# Altium PCB PCB.PcbDoc
Units mil, origin at the board's own origin, x right, y up, seen from the top; angles counter-clockwise.
Board outline 1740.03 x 1555.03 mil, 2 copper layers (Top Layer, Bottom Layer); 49 components, 128 nets, 276 pads, 47 vias.
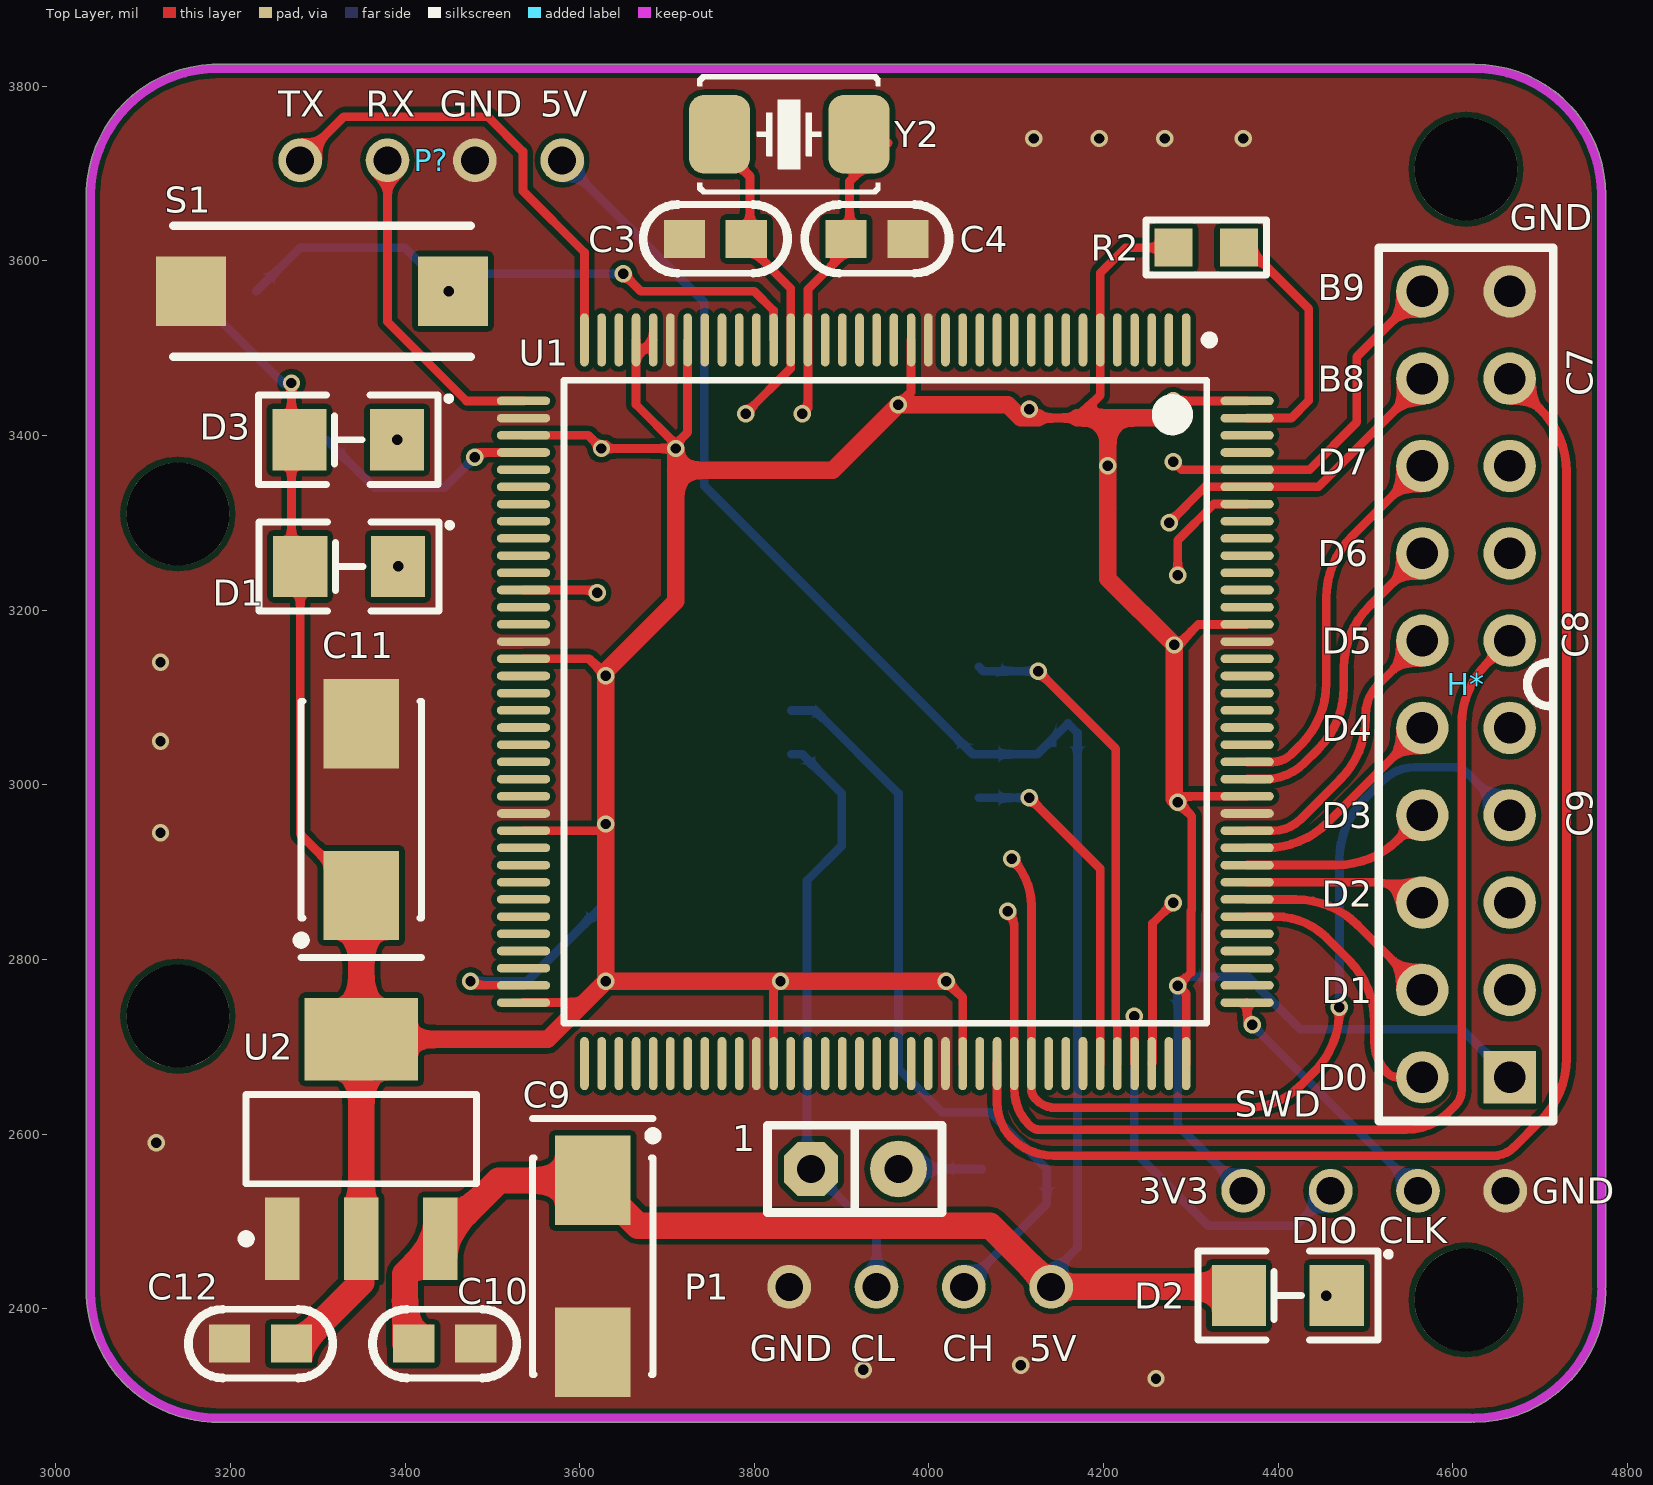
[diagram p0: Top Layer view]
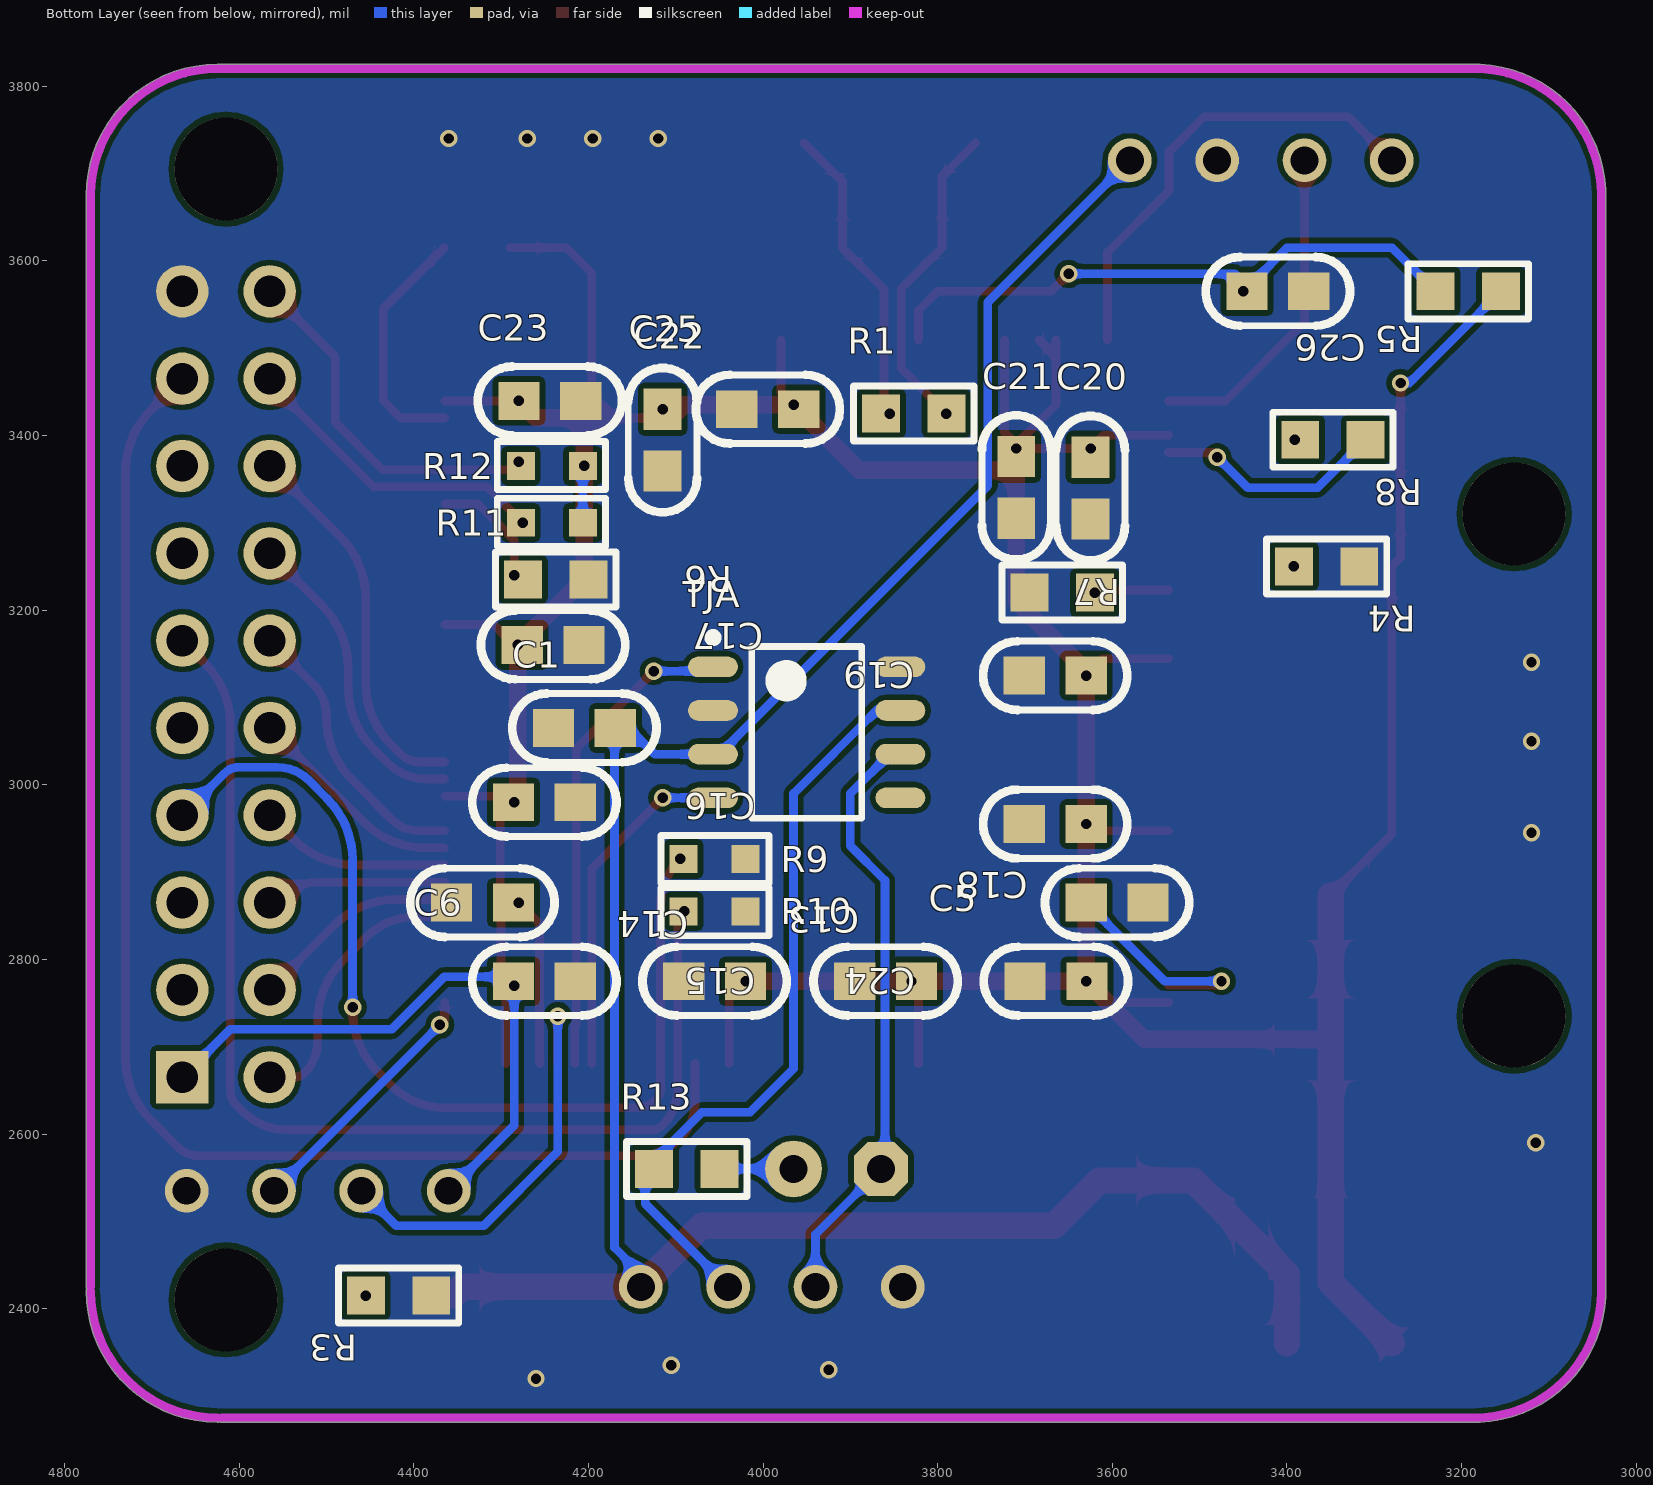
[diagram p1: Bottom Layer view, seen from below]
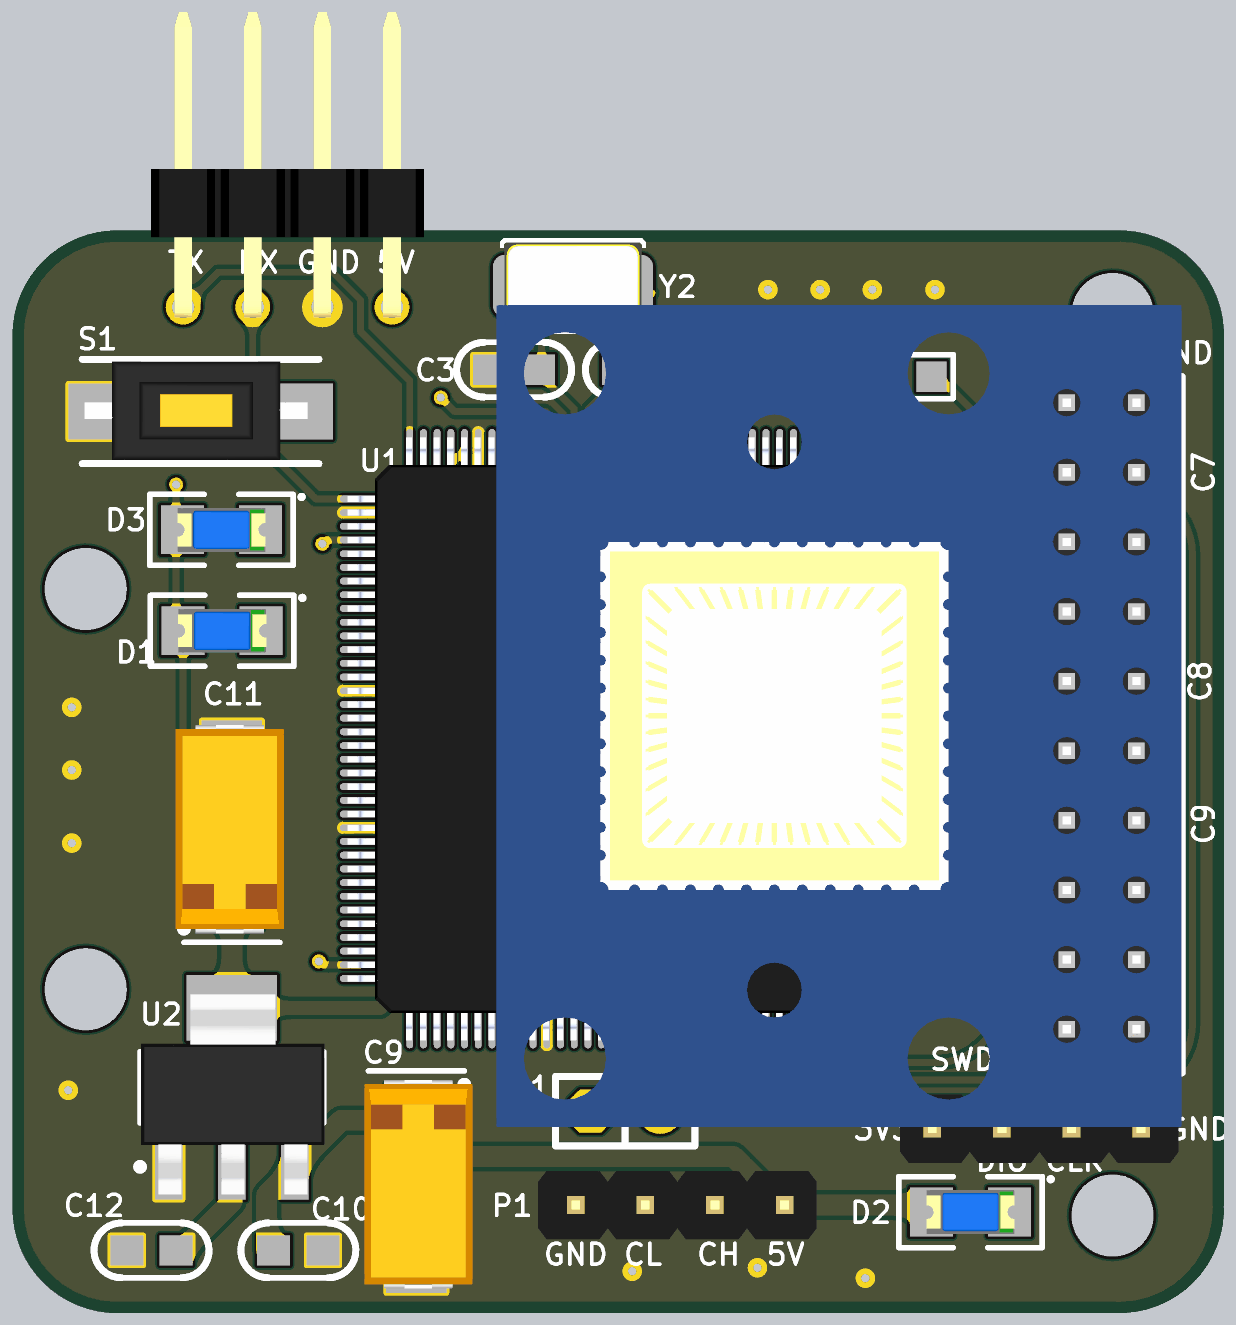
[diagram p2: 3D render of the assembled board from above, using the file's embedded part models]

## Layer stack, top to bottom
Top Solder: solder mask 0.4, Solder Resist, Dk 3.5
Top Layer: signal copper 1.4
Dielectric 1: dielectric 12.6, FR-4, Dk 4.8
Bottom Layer: signal copper 1.4
Bottom Solder: solder mask 0.4, Solder Resist, Dk 3.5

## Board outline
3035.11,2413.89 cw(c3040,2415) 3034.99,2415 3034.99,3680 cw(c3040,3680) 3035.11,3681.11 cw(c3185,3675) 3178.89,3824.89 cw(c3180,3820) 3180,3825.01 4625,3825.01 cw(c4625,3675) 4775.02,3675 4775.02,2425 cw(c4770,2425) 4774.35,2422.5 cw(c4770,2420) 4775.02,2420 cw(c4625,2420) 4625,2269.99 cw(c4625,2275) 4622.5,2270.65 cw(c4620,2275) 4620,2269.99 3180,2269.99 cw(c3180,2275) 3178.89,2270.11 cw(c3185,2420)

## Design rules (kind name [scope] priority, off if disabled: settings)
Clearance [All] p1: gap=6 ignorepadtopadclearanceinfootprint=FALSE
PlaneConnect [All] p1: planeconnectstyle=Direct reliefexpansion=20 reliefentries=4 reliefconductorwidth=10 reliefairgap=10
PolygonConnect [All] p1: connectstyle=Direct reliefconductorwidth=10 reliefentries=4 polygonreliefangle="90 Angle" airgapwidth=10
RoutingVias [All] p1: holewidth=28 width=50 viastyle="Through Hole" minholewidth=28 minwidth=50 maxholewidth=28 maxwidth=50
SolderMaskExpansion [All] p1: expansion=4
Width [All] p1: maxlimit=80 minlimit=10 preferedwidth=10 minimp=50.000000 maximp=50.000000 favimp=50.000000
29 further rules are at their usual default settings.

## Classes and differential pairs
component class 接口: 1 C1 H* P1 P? R9 R10 R11 R12 R13 TJA
component class core: C3 C4 C5 C6 C9 C10 C11 C12 C13 C14 C15 C16 C17 C18 C19 C20 C21 C22 C23 C24 C25 C26 D1 D2 D3 R1 R2 R3 R4 R5 R6 R7 R8 S1 SWD U1 U2 Y2

## Components (designator, comment, footprint, x,y, rotation, side; value= is the part's Value field where it differs from the comment)
1 "Header 2" SIP2 3965,2560 r180 top
C1 "CAP" CAP-MLCC-0603 4240,3065 r180 bottom value=104
C3 "CAP" CAP-MLCC-0603 3720,3625 r0 top value=22pF
C4 "CAP" CAP-MLCC-0603 3975.87,3625 r180 top value=22pF
C5 "225" CAP-MLCC-0603 3630,2865 r180 bottom value=*μF
C6 "225" CAP-MLCC-0603 4285.87,2865 r0 bottom value=*μF
C9 "CAP-TAN" CAP-TAN-6032/CAPC 3615,2546.85 r90 top value=47μF
C10 "CAP" CAP-MLCC-0603 3480.87,2360 r180 top value=104
C11 "CAP-TAN" CAP-TAN-6032/CAPC 3350,2873.15 r270 top value=47μF
C12 "CAP" CAP-MLCC-0603 3199.13,2360 r0 top value=104
C13 "CAP" CAP-MLCC-0603 3895,2775 r180 bottom value=104
C14 "CAP" CAP-MLCC-0603 4090.87,2775 r180 bottom value=104
C15 "CAP" CAP-MLCC-0603 4215,2775 r0 bottom value=104
C16 "CAP" CAP-MLCC-0603 4215,2980 r0 bottom value=104
C17 "CAP" CAP-MLCC-0603 4205,3160 r0 bottom value=104
C18 "CAP" CAP-MLCC-0603 3700.87,2955 r180 bottom value=104
C19 "CAP" CAP-MLCC-0603 3700.87,3125 r180 bottom value=104
C20 "CAP" CAP-MLCC-0603 3625,3304.13 r90 bottom value=104
C21 "CAP" CAP-MLCC-0603 3710,3305 r90 bottom value=104
C22 "CAP" CAP-MLCC-0603 4030,3430 r180 bottom value=104
C23 "CAP" CAP-MLCC-0603 4208.62,3439.49 r0 bottom value=104
C24 "1uF" CAP-MLCC-0603 3700,2775 r180 bottom value=*μF
C25 "10nF" CAP-MLCC-0603 4115,3359.13 r90 bottom value=*μF
C26 "0.1u" CAP-MLCC-0603 3375,3565 r0 bottom value=*μF
D1 "LED" LED-1206 3336,3250 r180 top value=(Red)
D2 "LED" LED-1206 4411,2415 r180 top value=(Red)
D3 "LED" LED-1206 3335,3395 r180 top value=(Red)
H* "鹰眼" H10X2 4665,2665 r180 top
P1 "HDR1x4_2.54" HDR1x4_2.54_180 4140,2425 r270 top
P? "HDR1x4_2.54" HDR1X4_2.54_90 3280,3715 r90 top
R1 "1MΩ" RES-0603 3790,3425 r0 bottom value=*kΩ
R2 "0Ω" RES-0603 4280.2,3615 r0 top value=*kΩ
R3 "RES" RES-0603 4454.8,2415 r180 bottom value=2kΩ
R4 "RES" RES-0603 3317.2,3250 r0 bottom value=1K
R5 "RES" RES-0603 3229.8,3565 r180 bottom value=100K
R6 "RES" RES-0603 4200,3235 r0 bottom value=10kΩ
R7 "RES" RES-0603 3694.8,3220 r180 bottom value=10kΩ
R8 "RES" RES-0603 3310,3395 r0 bottom value=1K
R9 "Res_0603" RES_0603 4057,2833 r0 bottom value=150R
R10 "Res_0603" RES_0603 4057,2773 r0 bottom value=150R
R11 "Res_0603" RES_0603 4240.37,3382 r180 bottom value=?K
R12 "Res_0603" RES_0603 4240.37,3447 r180 bottom value=4.7K
R13 "Res1" RES-0603 4050,2560 r0 bottom value=120
S1 "SW-PB" KEY_SMD 3300,3560 r180 top
SWD "HDR1x4_2.54" HDR1x4_2.54_180 4360,2535 r90 top
TJA "TJA1050" TJA1050 3950,3060 r180 bottom
U1 "STM32F407ZGET6" LQFP144-L 3950,3095 r270 top
U2 "IC-AS1117-3.3V" SOT-223 3259.45,2480 r0 top
Y2 "8MHz" XT_5032_2 3840,3745 r180 top

## Footprints (in the part's own frame and the unit in brackets; to place one, negate y for a bottom-side part, rotate by r counter-clockwise, add the part's x,y. Pads: shape width x height; smd on the part's side, far side on the other; paste and mask are expansions set on the pad)
CAP-MLCC-0603 [mm]
  rect 1.2x1.1 smd: 1(0,0) 2(1.8,0)
  silkscreen extent -1.2,-1 3,1, body extent 0.02,-0.48 1.77,0.47, height 0.85
CAP-TAN-6032/CAPC [mm]
  rect 2.6x2.2 smd: 1(0,0) 2(-5,0)
  silkscreen extent -5.65,-1.88 1.8,1.75, body extent -6.13,-2.05 1.47,1.9, height 3.1
H10X2 [mil] "鹰眼直插管脚"
  rect 60x60 hole 36: 1(0,0)
  round 60 hole 36: 2(100,0) 3(0,-100) 4(100,-100) 5(0,-200) 6(100,-200) 7(0,-300) 8(100,-300) 9(0,-400) 10(100,-400) 11(0,-500) 12(100,-500) 13(0,-600) 14(100,-600) 15(0,-700) 16(100,-700) 17(0,-800) 18(100,-800) 19(0,-900) 20(100,-900)
  silkscreen extent -50,-950 150,50, body extent -49,-1053 935,128, height 529
HDR1X4_2.54_90 [mil]
  round 50 hole 32: 1(0,0) 2(0,-100) 3(0,-200) 4(0,-300)
  body extent -15,-346 424,46, height 99
HDR1x4_2.54_180 [mil]
  round 50 hole 32: 1(0,0) 2(0,-100) 3(0,-200) 4(0,-300)
  body extent -49,-350 49,50, height 323
KEY_SMD [mil]
  rect 80x80 smd: 1(-155,-5) 2(145,-5)
  silkscreen extent -175,-80 165,70, body extent -159,-77 162,65, height 98
LED-1206 [mil]
  rect 62x70 smd: 1(56,0) 2(-56,0)
  silkscreen extent -116,-51 103,51, body extent -63,-31 63,32, height 43
LQFP144-L [mm]
  oval 1.55x0.25 smd: 1(-10.525,8.75) 2(-10.525,8.25) 3(-10.525,7.75) 4(-10.525,7.25) 5(-10.525,6.75) 6(-10.525,6.25) 7(-10.525,5.75) 8(-10.525,5.25) 9(-10.525,4.75) 10(-10.525,4.25) 11(-10.525,3.75) 12(-10.525,3.25) 13(-10.525,2.75) 14(-10.525,2.25) 15(-10.525,1.75) 16(-10.525,1.25) 17(-10.525,0.75) 18(-10.525,0.25) 19(-10.525,-0.25) 20(-10.525,-0.75) 21(-10.525,-1.25) 22(-10.525,-1.75) 23(-10.525,-2.25) 24(-10.525,-2.75) 25(-10.525,-3.25) 26(-10.525,-3.75) 27(-10.525,-4.25) 28(-10.525,-4.75) 29(-10.525,-5.25) 30(-10.525,-5.75) 31(-10.525,-6.25) 32(-10.525,-6.75) 33(-10.525,-7.25) 34(-10.525,-7.75) 35(-10.525,-8.25) 36(-10.525,-8.75) 73(10.525,-8.75) 74(10.525,-8.25) 75(10.525,-7.75) 76(10.525,-7.25) 77(10.525,-6.75) 78(10.525,-6.25) 79(10.525,-5.75) 80(10.525,-5.25) 81(10.525,-4.75) 82(10.525,-4.25) 83(10.525,-3.75) 84(10.525,-3.25) 85(10.525,-2.75) 86(10.525,-2.25) 87(10.525,-1.75) 88(10.525,-1.25) 89(10.525,-0.75) 90(10.525,-0.25) 91(10.525,0.25) 92(10.525,0.75) 93(10.525,1.25) 94(10.525,1.75) 95(10.525,2.25) 96(10.525,2.75) 97(10.525,3.25) 98(10.525,3.75) 99(10.525,4.25) 100(10.525,4.75) 101(10.525,5.25) 102(10.525,5.75) 103(10.525,6.25) 104(10.525,6.75) 105(10.525,7.25) 106(10.525,7.75) 107(10.525,8.25) 108(10.525,8.75)
  oval 0.25x1.55 smd: 37(-8.75,-10.525) 38(-8.25,-10.525) 39(-7.75,-10.525) 40(-7.25,-10.525) 41(-6.75,-10.525) 42(-6.25,-10.525) 43(-5.75,-10.525) 44(-5.25,-10.525) 45(-4.75,-10.525) 46(-4.25,-10.525) 47(-3.75,-10.525) 48(-3.25,-10.525) 49(-2.75,-10.525) 50(-2.25,-10.525) 51(-1.75,-10.525) 52(-1.25,-10.525) 53(-0.75,-10.525) 54(-0.25,-10.525) 55(0.25,-10.525) 56(0.75,-10.525) 57(1.25,-10.525) 58(1.75,-10.525) 59(2.25,-10.525) 60(2.75,-10.525) 61(3.25,-10.525) 62(3.75,-10.525) 63(4.25,-10.525) 64(4.75,-10.525) 65(5.25,-10.525) 66(5.75,-10.525) 67(6.25,-10.525) 68(6.75,-10.525) 69(7.25,-10.525) 70(7.75,-10.525) 71(8.25,-10.525) 72(8.75,-10.525) 109(8.75,10.525) 110(8.25,10.525) 111(7.75,10.525) 112(7.25,10.525) 113(6.75,10.525) 114(6.25,10.525) 115(5.75,10.525) 116(5.25,10.525) 117(4.75,10.525) 118(4.25,10.525) 119(3.75,10.525) 120(3.25,10.525) 121(2.75,10.525) 122(2.25,10.525) 123(1.75,10.525) 124(1.25,10.525) 125(0.75,10.525) 126(0.25,10.525) 127(-0.25,10.525) 128(-0.75,10.525) 129(-1.25,10.525) 130(-1.75,10.525) 131(-2.25,10.525) 132(-2.75,10.525) 133(-3.25,10.525) 134(-3.75,10.525) 135(-4.25,10.525) 136(-4.75,10.525) 137(-5.25,10.525) 138(-5.75,10.525) 139(-6.25,10.525) 140(-6.75,10.525) 141(-7.25,10.525) 142(-7.75,10.525) 143(-8.25,10.525) 144(-8.75,10.525)
  silkscreen extent -10.65,-9.35 9.35,9.55, body extent -10.99,-11.02 11.01,10.98, height 1.56
RES-0603 [mm]
  rect 1.1x1.1 smd: 1(0,0) 2(1.9,0)
  silkscreen extent -0.8,-0.8 2.7,0.8, body extent 0.1,-0.48 1.8,0.47, height 0.6
RES_0603 [mil]
  rect 32x32 smd: 1(-37,-82) 2(34,-82)
  silkscreen extent -64,-109 60,-54, body extent -31,-98 31,-66, height 18
SIP2 [mil]
  round 65 hole 32: 1(0,0)
  oct 62x62 hole 32: 2(100,0)
  silkscreen extent -50,-50 150,50
SOT-223 [mm] "SOT223, 4-Leads, Body 6.7x7.3mm (max), Pitch 2.30mm, IPC Medium Density"
  rect 1x2.4 smd: 1(0,0) 2(2.3,0) 3(4.6,0)
  rect 3.3x2.4 smd: 2(2.3,5.8)
  silkscreen extent -1.17,-0.12 5.65,4.2, body extent -1.01,-1.01 5.69,6.29, height 1.8
TJA1050 [mm] "SOIC, 8-Leads, Body 4.90x3.90mm, Pitch 1.27mm, IPC Medium Density"
  oval 1.45x0.6 smd: 1(-2.725,1.905) 2(-2.725,0.635) 3(-2.725,-0.635) 4(-2.725,-1.905) 5(2.725,-1.905) 6(2.725,-0.635) 7(2.725,0.635) 8(2.725,1.905)
  silkscreen extent -2.85,-2.5 1.6,2.88, body extent -2,-2.5 2,2.5, height 1.75
XT_5032_2 [mil]
  rrect50% 70x90 smd: 1(-80,0) 2(80,0)
  silkscreen extent -105,-69 105,69, body extent -98,-63 98,63, height 39

## Part data
1: "Header, 2-Pin", LatestRevisionDate=17-Jul-2002, LatestRevisionNote="Re-released for DXP Platform.", Publisher="Altium Limited"
C1 C3 C4 C10 C12 C13 C14 C15 C16 C17 C18 C19 C20 C21 C22 C23: "无极性电容", LatestRevisionDate=17-Jul-2002, LatestRevisionNote="Re-released for DXP Platform.", PackageDescription="Radial Cap, Thru-Hole; 2 Leads; 0.3 in Pin Spacing", PackageReference=RAD-0.3, Published=8-Jun-2000, Publisher="Altium Limited"
C5 C6 C24 C25 C26: library part CAP, "无极性电容", LatestRevisionDate=17-Jul-2002, LatestRevisionNote="Re-released for DXP Platform.", PackageDescription="Radial Cap, Thru-Hole; 2 Leads; 0.3 in Pin Spacing", PackageReference=RAD-0.3, Published=8-Jun-2000, Publisher="Altium Limited"
C9 C11: "钽电容", LatestRevisionDate=17-Jul-2002, LatestRevisionNote="Re-released for DXP Platform.", PackageDescription="Polarized Capacitor; 2 Leads", PackageReference=POLAR0.8, Published=8-Jun-2000, Publisher="Altium Limited"
H*: "鹰眼直插管脚"
P1 P? SWD: "Header"
R1 R2: library part RES, "电阻", LatestRevisionDate=17-Jul-2002, LatestRevisionNote="Re-released for DXP Platform.", PackageDescription="Axial Device, Thru-Hole; 2 Leads; 0.3 in Pin Spacing", PackageReference=AXIAL-0.3, Published=8-Jun-2000, Publisher="Altium Limited"
R3 R4 R5 R6 R7 R8: "电阻", LatestRevisionDate=17-Jul-2002, LatestRevisionNote="Re-released for DXP Platform.", PackageDescription="Axial Device, Thru-Hole; 2 Leads; 0.3 in Pin Spacing", PackageReference=AXIAL-0.3, Published=8-Jun-2000, Publisher="Altium Limited"
R9 R10 R11 R12 R13: "Resistor"
  R13: LatestRevisionDate=17-Jul-2002, LatestRevisionNote="Re-released for DXP Platform.", PackageReference=AXIAL-0.3, Published=8-Jun-2000, Publisher="Altium Limited"
S1: "Switch", LatestRevisionDate=17-Jul-2002, LatestRevisionNote="Re-released for DXP Platform.", PackageDescription="Switch; 2 Leads", PackageReference=SPST-2, Published=24-Mar-1999, Publisher="Altium Limited"
TJA: "CAN总线收发器"
U1: library part Component_1
U2: "AS1117-3.3V"
Y2: library part C-Osc, "Crystal Oscillator", LatestRevisionDate=17-Jul-2002, LatestRevisionNote="Re-released for DXP Platform.", PackageDescription="Crystal, Thru-Hole; 2 Leads; Body 3.1 x 8.2 mm (Dia.xH)", PackageReference=R38, Published=8-Jun-2000, Publisher="Altium Limited"
D1 D2 D3: LatestRevisionDate=08-Jul-2005, LatestRevisionNote="Mech Layer 1 removed.", PackageDescription="LED; 2 Leads", PackageReference=LED-1, Published=8-Jun-2000, Publisher="Altium Limited"

## Free pads (board coordinates)
  round 118.11 hole 118.11 unplated: 2(3140,2735) 2(3140,3310) 2(4615,2410) 2(4615,3705)

## Via types
v1: diameter 20, hole 12, Top Layer to Bottom Layer, 47 vias

## Nets (pads, with @x,y where several pads share a name; then routed paths per layer and width w, separated by ;. In a path a pad name is that pad's centre, name@x,y a point inside that pad or via, vN(x,y) a via of type N, cw(c..) or ccw(c..) an arc to the next point about the centre after c; other vN are vias at no path point)
5V: C1.2 C9.1 C10.2 D2.1 P1.1 P?.4 TJA.3 U2.3 | length 2793.8
  Top Layer w30: C10.2@3400,2360 3400,2439.45 U2.3 3507.4,2546.85 C9.1 3666.85,2495 4070,2495 P1.1 4345,2425 D2.1
  Bottom Layer w10: P?.4 3742.65,3552.35 3742.65,3342.35 4050,3035 TJA.3 4124.13,3035 4159.13,3070 4170,3059.13 4170,2470 4140,2440 P1.1
BOOT0: R6.2 U1.138 | length 136.5
  Top Layer w10: v1(4285,3240) 4285,3280 4326.38,3321.38 U1.138
BOOT1: R7.2 U1.48 | length 85.6
  Top Layer w10: U1.48 3617.05,3222.95 v1(3620,3220)
CAN_RX: TJA.4 U1.103 | length 395.7
  Top Layer w10: v1(4115,2985) 4196.06,2903.94 U1.103
  Bottom Layer w10: TJA.4 v1(4115,2985)
CAN_TX: TJA.1 U1.104 | length 556.7
  Top Layer w10: v1(4125,3130) 4214,3041 4214,2726.3 4215.75,2724.55 U1.104
  Bottom Layer w10: TJA.1 4062.28,3130 v1(4125,3130)
CANH: P1.2 R13.2 TJA.7 | length 868.6
  Bottom Layer w10: TJA.7 3870,3085 3965,2990 3965,2675 4015,2625 4070,2625 4135,2560 4135,2520 P1.2
CANL: 1.2 P1.3 TJA.6 | length 690.3
  Bottom Layer w10: TJA.6 3855,3035 3900,2990 3900,2930 3860.38,2890.38 3860.38,2564.62 1.2 3940,2485 P1.3
DCMI_D0: H*.2 U1.114 | length 315.9
  Top Layer w10: U1.114 4397.21,2848.94 cw(c4397.21,2767.21) 4455,2825 4480.71,2799.29 cw(c4410,2728.58) 4510,2728.58 4510,2706.21 ccw(c4561.21,2706.21) 4525,2670 ccw(c4537.07,2682.07) 4537.07,2665 H*.2
DCMI_D1: H*.4 U1.115 | length 239.2
  Top Layer w10: U1.115 4419.96,2868.62 cw(c4419.96,2768.62) 4490.67,2839.33 H*.4
DCMI_D2: H*.6 U1.116 | length 206.9
  Top Layer w10: U1.116 4508.73,2888.31 cw(c4508.73,2808.73) H*.6
DCMI_D3: H*.8 U1.117 | length 219.9
  Top Layer w10: U1.117 4466.57,2907.99 ccw(c4466.57,3007.99) 4537.28,2937.28 H*.8
DCMI_D4: H*.10 U1.118 | length 253.2
  Top Layer w10: U1.118 4386.26,2927.68 ccw(c4386.26,3027.68) 4456.97,2956.97 H*.10
DCMI_D5: H*.12 U1.119 | length 320.6
  Top Layer w10: U1.119 4394.49,2947.36 ccw(c4394.49,2990.51) 4425,2960 4470.71,3005.71 ccw(c4400,3076.42) 4500,3076.42 4500,3080 cw(c4548.28,3080) 4514.14,3114.14 H*.12
DCMI_D6: H*.14 U1.122 | length 357.9
  Top Layer w10: U1.122 4385.14,3006.42 ccw(c4385.14,3069.86) 4430,3025 4445.71,3040.71 ccw(c4375,3111.42) 4475,3111.42 4475,3133.58 cw(c4575,3133.58) 4504.29,3204.29 H*.14
DCMI_D7: H*.16 U1.123 | length 436.5
  Top Layer w10: U1.123 4393.52,3026.1 ccw(c4393.52,3056.48) 4415,3035 4425.71,3045.71 ccw(c4355,3116.42) 4455,3116.42 4455,3213.58 cw(c4555,3213.58) 4484.29,3284.29 H*.16
GND: C1.1 C3.1 C4.1 C5.2 C6.2 C9.2 C10.1 C11.2 C12.1 C13.1 C14.1 C15.1 C16.1 C17.1 C18.1 C19.1 C20.1 C21.1 C22.1 C23.1 C24.1 C25.1 C26.1 H*.19 P1.4 P?.3 R3.2 R4.1 R6.1 R7.1 R9.1 R10.1 S1.2 SWD.4 TJA.2 TJA.8 U1.16 U1.31 U1.38 U1.51 U1.61 U1.83 U1.94 U1.120 U1.130 U2.1
  other v1: 4260,2320 3925,2330 4105,2335 3115,2590 3120,2945 3120,3050 3120,3140 4120,3740 4195,3740 4270,3740 4360,3740
Net1_1: 1.1 R13.1 | length 95.2
  Bottom Layer w10: 1.1 R13.1 R13.1@4060.2,2560
NetC5_1: C5.1 U1.71 | length 254.9
  Top Layer w10: v1(3475,2775) 3479.8,2770.2 U1.71
  Bottom Layer w10: v1(3475,2775) 3540,2775 C5.1
NetC6_1: C6.1 U1.106 | length 194.7
  Top Layer w10: U1.106 4256,2681.51 4256,2841 v1(4280,2865)
NetD1_2: D1.2 R4.2
  other v1: 3392,3250
NetD2_2: D2.2 R3.1
  other v1: 4455,2415
NetD3_2: D3.2 R8.2
  other v1: 3391,3395
NetR2_2: R2.2 U1.143 | length 283
  Top Layer w10: U1.143 4414.8,3419.8 4435,3440 4435,3545 R2.2@4365,3615
PA0: U1.34
PA1: U1.35
PA2: P?.1 U1.36 | length 537.1
  Top Layer w10: P?.1 3330,3765 3495,3765 3535,3725 3535,3680 3605.51,3609.49 U1.36
PA3: P?.2 U1.37 | length 378.1
  Top Layer w10: P?.2 3380,3530 3470.51,3439.49 U1.37
PA4: R8.1 U1.40 | length 270.2
  Top Layer w10: v1(3480,3375) 3485.43,3380.43 U1.40
  Bottom Layer w10: R8.1 3365,3340 3445,3340 v1(3480,3375) v1@3485,3375
PA5: U1.41
PA6: U1.42
PA7: U1.43
PA8: U1.100
PA9: U1.101
PA10: U1.102
PA13: SWD.2 U1.105 | length 486.3
  Top Layer w10: v1(4235,2735) 4235.43,2734.57 U1.105
  Bottom Layer w10: v1(4235,2735) 4235,2580 4320,2495 4420,2495 SWD.2
PA14: SWD.3 U1.109 | length 296.5
  Top Layer w10: U1.109 4364.37,2730.63 v1(4370,2725)
  Bottom Layer w10: v1(4370,2725) SWD.3
PA15: U1.110
PB0: U1.46
PB1: U1.47
PB3: U1.133
PB4: U1.134
PB5: U1.135
PB6: U1.136
PB7: U1.137
PB8: H*.18 R11.1 U1.139 | length 361.3
  Top Layer w10: v1(4275,3300) 4316.06,3341.06 U1.139 4446.06,3341.06 4565,3460 H*.18
PB9: H*.20 R12.1 U1.140 | length 417.4
  Top Layer w10: v1(4280,3370) 4289.25,3360.75 U1.140 4435.75,3360.75 4490,3415 4490,3490 H*.20
PB10: U1.69
PB11: U1.70
PB12: U1.73
PB13: U1.74
PB14: U1.75
PB15: U1.76
PC0: U1.26
PC1: U1.27
PC2: U1.28
PC3: U1.29
PC4: U1.44
PC5: U1.45
PC6: U1.96
PC7: H*.17 U1.97 | length 1596.4
  Top Layer w10: U1.97 4077.95,2636.16 ccw(c4136.16,2636.16) 4095,2595 ccw(c4143.28,2643.28) 4143.28,2575 4645.86,2575 ccw(c4645.86,2609.14) 4670,2585 4700.71,2615.71 ccw(c4630,2686.42) 4730,2686.42 4730,3358.58 ccw(c4630,3358.58) 4700.71,3429.29 H*.17
PC8: H*.11 R10.2 U1.98 | length 1302
  Top Layer w10: v1(4090,2855) cw(c4071.56,2836.56) 4097.64,2836.56 U1.98 4097.64,2651.92 ccw(c4156.92,2651.92) 4115,2610 ccw(c4127.07,2622.07) 4127.07,2605 4546.72,2605 ccw(c4546.72,2673.28) 4595,2625 4602.93,2632.93 ccw(c4585.86,2650) 4610,2650 4610,3068.58 cw(c4710,3068.58) 4639.29,3139.29 H*.11
PC9: H*.7 R9.2 U1.99 | length 1146.1
  Top Layer w10: v1(4095,2915) cw(c4041.11,2861.11) 4117.32,2861.11 U1.99 4117.32,2651.64 ccw(c4133.79,2651.64) 4122.15,2640 4123.06,2639.09 ccw(c4145,2661.03) 4145,2630 4364.64,2630 ccw(c4364.64,2715.36) 4425,2655 4440.71,2670.71 ccw(c4370,2741.42) 4470,2741.42 v1(4470,2745)
  Bottom Layer w10: v1(4470,2745) 4470,2913.58 cw(c4570,2913.58) 4499.29,2984.29 4520,3005 cw(c4556.21,2968.79) 4556.21,3020 4600,3020 cw(c4600,2995.86) 4617.07,3012.93 H*.7
PC10: U1.111
PC11: U1.112
PC12: U1.113
PC13: U1.7
PC14: U1.8
PC15: U1.9
PD8: U1.77
PD9: U1.78
PD10: U1.79
PD11: U1.80
PD12: U1.81
PD13: U1.82
PD14: U1.85
PD15: U1.86
PE0: U1.141
PE1: U1.142
PE2: U1.1
PE3: U1.2
PE4: U1.3
PE5: U1.4
PE6: U1.5
PE7: U1.58
PE8: U1.59
PE9: U1.60
PE10: U1.63
PE11: U1.64
PE12: U1.65
PE13: U1.66
PE14: U1.67
PE15: U1.68
PF0: U1.10
PF1: U1.11
PF2: U1.12
PF3: U1.13
PF4: U1.14
PF5: U1.15
PF6: U1.18
PF7: U1.19
PF8: U1.20
PF9: U1.21
PF10: U1.22
PF11: U1.49
PF12: U1.50
PF13: U1.53
PF14: U1.54
PF15: U1.55
PG0: U1.56
PG1: U1.57
PG2: U1.87
PG3: U1.88
PG4: U1.89
PG5: U1.90
PG6: U1.91
PG7: U1.92
PG8: U1.93
PG9: U1.124
PG10: U1.125
PG11: U1.126
PG12: U1.127
PG13: U1.128
PG14: U1.129
PG15: U1.132
PH0: C4.2 R1.2 U1.23 Y2.1 | length 350.8
  Top Layer w10: v1(3855,3425) 3861.42,3431.42 U1.23 3861.42,3567.28 3909.13,3615 3909.13,3690.71 Y2.1@3953.43,3735
PH1: C3.2 R1.1 U1.24 Y2.2 | length 366.7
  Top Layer w10: Y2.2@3756.57,3735 3795,3696.57 3795,3615 3841.73,3568.27 U1.24 3841.73,3476.73 v1(3790,3425)
RESET: C26.2 R5.1 S1.1 U1.25 | length 695.9
  Top Layer w10: v1(3650,3585) 3670,3565 3800,3565 3822.05,3542.95 U1.25
  Bottom Layer w10: R5.1 3279.8,3615 3400,3615 C26.2@3445,3570 ; v1(3450,3565) C26.2@3445,3570 ; v1(3650,3585) 3460,3585 C26.2@3445,3570
VDDA: C11.1 C12.2 C13.2 C14.2 C15.2 C16.2 C17.2 C18.2 C19.2 C20.2 C21.2 C22.2 C23.2 C24.2 C25.2 D1.1 D3.1 H*.1 R2.1 R5.2 R11.2 R12.2 SWD.1 U1.6 U1.17 U1.30 U1.32 U1.33 U1.39 U1.52 U1.62 U1.72 U1.84 U1.95 U1.108 U1.121 U1.131 U1.144 U2.2 | length 6432.7
  Top Layer w10: v1(3270,3460) 3270,3260 D1.1 3280,2943.15 C11.1 ; U1.72 3605.51,2750.51 ; U1.62 3622.36,2947.36 v1(3630,2955) ; U1.52 3610.79,3144.21 v1(3630,3125) ; U1.39 3609.88,3400.12 v1(3625,3385) 3630,3390 3635,3385 v1(3710,3385) v1@3710,3390 ; U1.33 U1.33@3664.57,3489.68 ; U1.32 U1.33@3664.57,3489.68 ; U1.30 3723.62,3403.62 v1@3710,3390 ; U1.84 3822.05,2767.05 v1(3830,2775) ; v1(3965,3435) 3979.53,3449.53 U1.17 ; v1(4020,2775) 4038.58,2756.42 U1.95 ; v1(4115,3430) 4125,3420 4170,3420 4196.06,3446.06 U1.6 4196.06,3586.06 4225,3615 R2.1 R2.1@4290.2,3615 ; v1(4279.49,3439.49) U1.144 ; v1@4280.87,3155.87 4308.58,3183.58 U1.131 ; U1.108 4294.49,2760.51 v1(4285,2770) 4300,2785 4300,2855.3 4301,2856.3 4301,2964 v1(4285,2980) 4291.73,2986.73 U1.121 ; U1.33@3664.57,3489.68 3664.57,3435.43 v1@3710,3390
  Top Layer w20: U2.2@3350,2708.35 3563.35,2708.35 3605.51,2750.51 v1(3630,2775) ; v1(3710,3385) 3710,3360 ; v1(4020,2775) v1(3830,2775) v1(3630,2775) ; v1(4115,3430) 4105,3420 ; 4125,3420 4105,3420 ; 4170,3420 4205,3420 ; v1(4279.49,3439.49) 4260,3420 4205,3420 ; v1(4285,2980) 4280.87,2984.13 4280.87,3155.87 v1(4280.87,3160) 4205,3235.87 v1(4205,3365) 4205,3420 ; v1(3630,2775) v1(3630,2955) v1(3630,3125) 3630,3130 3710,3210 3710,3360 ; 3710,3360 3890,3360 v1(3965,3435) 4090,3435 4105,3420
  Top Layer w30: C12.2@3280,2360 3350,2430 3350,2480 3350,2708.35 C11.1
  Bottom Layer w10: R5.2 3260,3460 v1(3270,3460) ; R11.2 R12.2 ; SWD.1 4285,2610 v1(4285,2770) 4295,2780 4365,2780 4425,2720 4610,2720 H*.1
pads on no net: H*.3 H*.5 H*.9 H*.13 H*.15 TJA.5 U1.107

## Polygon pours and split planes (outlines as drawn)
GND on Bottom Layer "Top Layer-No Net" (solid, remove dead copper, pour order 4): 4855,2200 4840,2215 2800,2215 2800,3905 2890,3995 4950,3995
GND on Top Layer "Top Layer-No Net" (solid, remove dead copper, pour order 6): 4935,2190 2790,2190 2745,2235 2815,2305 2815,4105 4790,4105 4890,4005

## Keep-outs
Keep-Out Layer:
  lines w10: 3040,2415 3040,3555 3040,3680 ; 3040,2420 ccw(c3185,2420) 3185,2275 ; 3040,3675 cw(c3185,3675) 3185,3820 ; 3180,2275 4620,2275 ; 3180,3820 4625,3820 cw(c4625,3675) 4770,3675 4770,2425 ; 4625,2275 ccw(c4625,2420) 4770,2420

## Silkscreen, mask and mechanical layers (free items; w line width, h text height)
Top Overlay:
  text "TX" at 3255,3765 h30
  text "RX" at 3355,3765 h30
  text "GND" at 3440,3765 h30
  text "5V" at 3555,3765 h30
  text "GND" at 4665,3635 h30
  text "B9" at 4445,3555 h30
  text "B8" at 4445,3450 h30
  text "C7" at 4760,3445 h30 r90
  text "D7" at 4445,3355 h30
  text "D6" at 4445,3250 h30
  text "D5" at 4450,3150 h30
  text "C8" at 4755,3145 h30 r90
  text "D4" at 4450,3050 h30
  text "D3" at 4450,2950 h30
  text "C9" at 4760,2940 h30 r90
  text "D2" at 4450,2860 h30
  text "D1" at 4450,2750 h30
  text "D0" at 4445,2650 h30
  text "3V3" at 4240,2520 h30
  text "GND" at 4690,2520 h30
  text "DIO" at 4415,2475 h30
  text "CLK" at 4515,2475 h30
  text "GND" at 3795,2340 h30
  text "CL" at 3910,2340 h30
  text "CH" at 4015,2340 h30
  text "5V" at 4115,2340 h30